# EAGLE board 13697_Wireless_Motor_Driver_Shield-panel.v14 (EAGLE 7.5.0), part 1 of 4
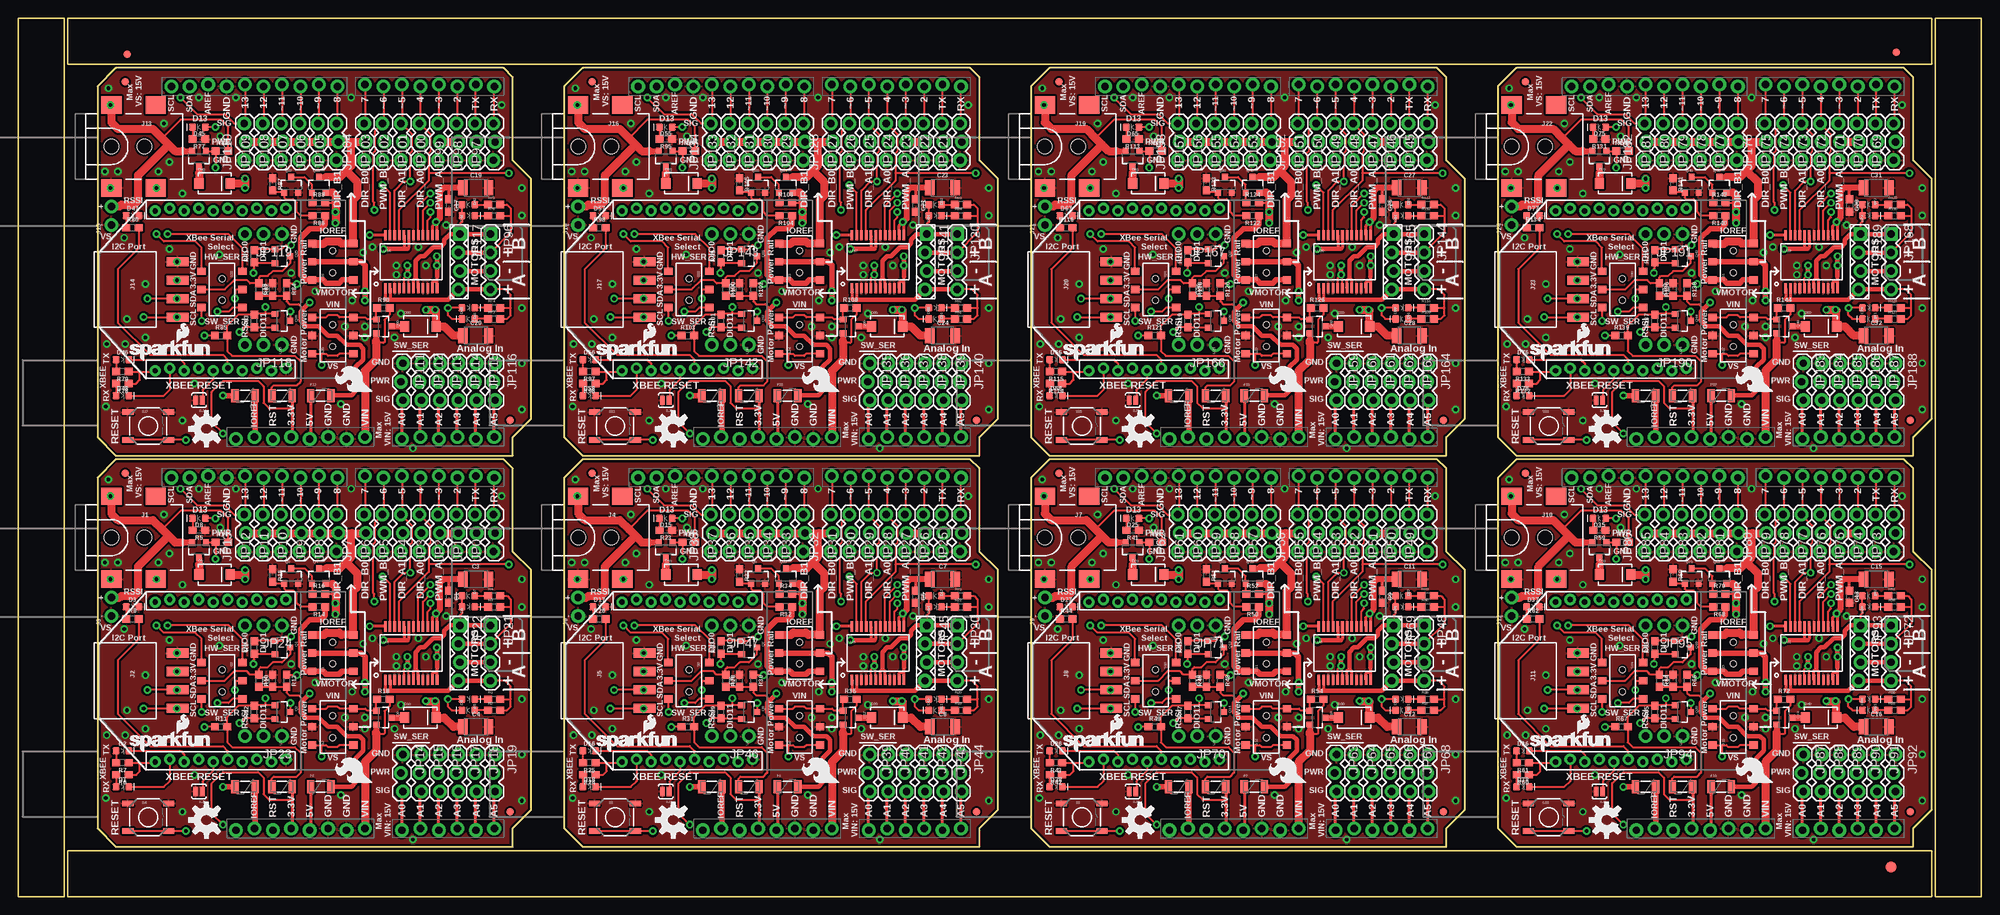
[diagram p0: board, top side]
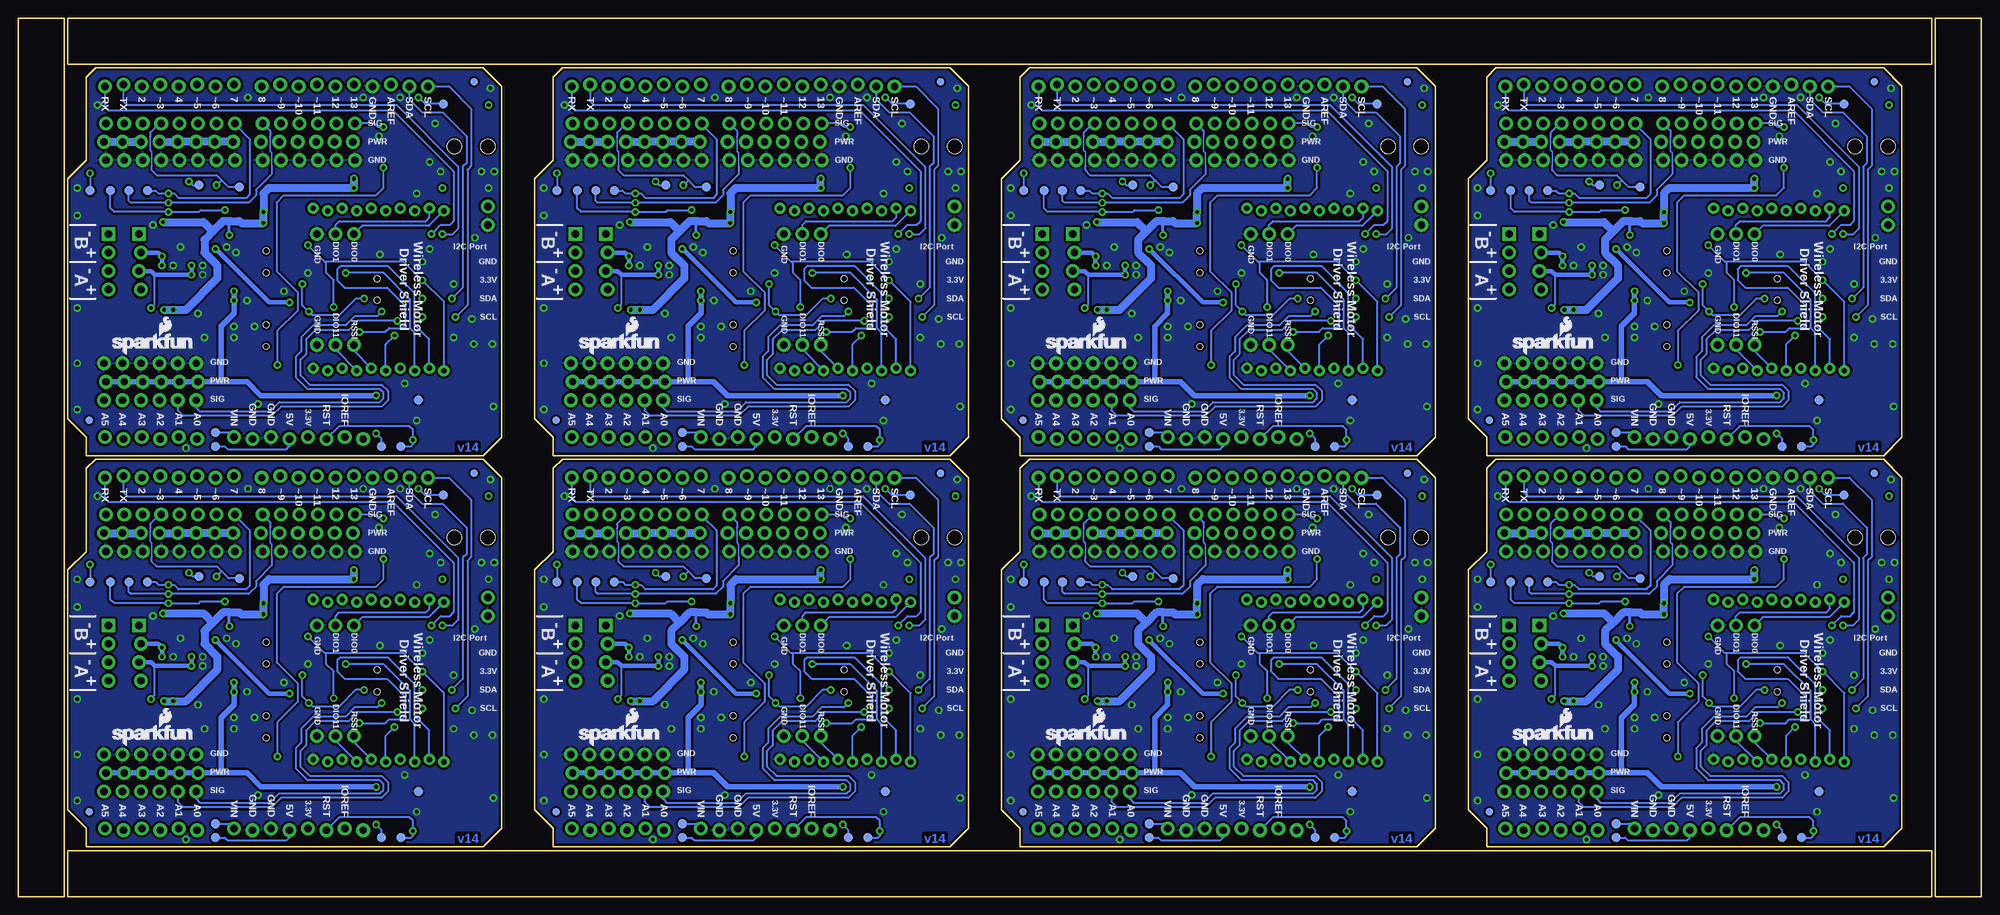
[diagram p1: board, bottom side, seen from below]

Size 270.26 x 120.9 mm. Coordinates in mm from the lower left corner, seen from the top.
Outline: 112 segments
Copper layers (1*16): Top 0.035mm / dielectric 1.5mm / Bottom 0.035mm
Design rules "SparkFun-2-layer-STANDARD": minimum track width 10mil, minimum drill 20mil, track to track 10mil, track to pad 8mil, pad to pad 8mil, via to via 10mil, smd to smd 8mil, copper to edge 8mil, drill to drill 8mil, minimum pad ring 10mil, minimum via ring 10mil, stop-mask expansion 4mil, vias tented up to drill 25mil, thermal gap 10mil
Net classes: 1 vcc: width 0.305 mm
tRestrict: area 52,29.7 to 52.3,30; area 55.9,29.7 to 56.2,30; area 116.3,29.7 to 116.5,30; area 120.2,29.7 to 120.4,30; area 180.6,29.7 to 180.8,30; area 184.5,29.7 to 184.7,30; area 244.8,29.7 to 245.1,30; area 248.7,29.7 to 248.9,30; area 52,83.6 to 52.3,83.8; area 55.9,83.6 to 56.2,83.8; area 116.3,83.6 to 116.5,83.8; area 120.2,83.6 to 120.4,83.8; 4 more areas

## Footprints (pad centres in the part's own frame; a part is rotated, then mirrored left to right if it is on the bottom)
0603 = smd 1.1 x 1: 1 -0.85,0; 2 0.85,0
1210 = smd 1.27 x 2.06: 1 -1.755,0; 2 1.755,0
LED-0603 = smd 1 x 1: A -0.877,0; C 0.877,0
SMA-DIODE = smd 1.27 x 1.47: A -2.15,0; C 2.15,0
FIDUCIAL-1.5X3 = smd 1.5 x 1.5: 1 0,0
FIDUCIAL-1X2 = smd 1 x 1: 1 0,0
PTC-1206 = smd 1 x 1.8: 1 -1.4,0; 2 1.4,0
POWER_JACK_SMD = smd 2.8 x 2.4: GND 0,-5.7; P$4 6.1,-5.7; VIN0 0,5.7; VIN1 6.1,5.7 | hole 2.032: 0,0; 4.572,0
1X04_SMD_RA_FEMALE = smd 1.25 x 3: 1 -3.81,7.225; 2 -1.27,7.225; 3 1.27,7.225; 4 3.81,7.225
1X02_NO_SILK = drill 1.016 pad 1.88: 1 0,0; 2 2.54,0
1X03_LOCK = drill 1.016 pad 1.88: 1 0,0.127; 2 2.54,-0.127; 3 5.08,0.127
1X04@1 = drill 1.016 pad 1.88 square: 1 0,0 | drill 1.016 pad 1.88: 2 2.54,0; 3 5.08,0; 4 7.62,0
1X04_LOCK@1 = drill 1.016 pad 1.88 square: 1 0,0.127 | drill 1.016 pad 1.88: 2 2.54,-0.127; 3 5.08,0.127; 4 7.62,-0.127
1X03_NO_SILK = drill 1.016 pad 1.88: 1 0,0; 2 2.54,0; 3 5.08,0
SOT23-3 = smd 0.8 x 0.9: 1 -0.95,-1; 2 0.95,-1; 3 0,1.1
AYZ0202 = smd 1 x 1.15: 1 -2.5,2.825; 2 0,2.825; 3 2.5,2.825; 4 -2.5,-2.825; 5 0,-2.825; 6 2.5,-2.825 | hole 0.85: 1.5,0; -1.5,0
TACTILE-SWITCH-SMD = smd 1.524 x 0.762: 1 -2.794,1.905; 2 2.794,1.905; 3 -2.794,-1.905; 4 2.794,-1.905
SJ_2S-NO = smd 0.635 x 1.27: 1 -0.45,0; 2 0.45,0
PAD.03X.05 = smd 1.27 x 1.27: P$1 0,0
XBEE-1_LOCK = drill 0.737 pad 1.524: 1 -11.178,20; 2 -10.822,18; 3 -11.178,16; 4 -10.822,14; 5 -11.178,12; 6 -10.822,10; 7 -11.178,8; 8 -10.822,6; 9 -11.178,4; 10 -10.822,2; 11 11.178,2; 12 10.822,4; 13 11.178,6; 14 10.822,8; 15 11.178,10; 16 10.822,12; 17 11.178,14; 18 10.822,16; 19 11.178,18; 20 10.822,20
UNO_R3_SHIELD_NOLABELS_LOCK = drill 1.016 pad 1.88: 3.3V 50.8,26.67; 5V 51.054,29.21; A0 51.054,41.91; A1 50.8,44.45; A2 51.054,46.99; A3 50.8,49.53; A4 51.054,52.07; A5 50.8,54.61; AREF 2.286,15.24; D2 2.54,49.53; D3 2.286,46.99; D4 2.54,44.45; D5 2.286,41.91; D6 2.54,39.37; D7 2.286,36.83; D8 2.54,33.02; D9 2.286,30.48; D10 2.54,27.94; D11 2.286,25.4; D12 2.54,22.86; D13 2.286,20.32; GND@0 50.8,31.75; GND@1 51.054,34.29; GND@2 2.54,17.78; IOREF 50.8,21.59; NC 51.054,19.05; RES 51.054,24.13; RX 2.54,54.61; SCL 2.54,10.16; SDA 2.54,12.7; TX 2.286,52.07; VIN 50.8,36.83
SSOP24 = smd 0.348 x 1.397: 1 -3.575,-3.656; 2 -2.925,-3.656; 3 -2.275,-3.656; 4 -1.625,-3.656; 5 -0.975,-3.656; 6 -0.325,-3.656; 7 0.325,-3.656; 8 0.975,-3.656; 9 1.625,-3.656; 10 2.275,-3.656; 11 2.925,-3.656; 12 3.575,-3.656; 13 3.575,3.656; 14 2.925,3.656; 15 2.275,3.656; 16 1.625,3.656; 17 0.975,3.656; 18 0.325,3.656; 19 -0.325,3.656; 20 -0.975,3.656; 21 -1.625,3.656; 22 -2.275,3.656; 23 -2.925,3.656; 24 -3.575,3.656

## Placement (x,y rotation side)
C1  0.1uF  [0603]  59.31,41.27 270 top
C2  0.1uF  [0603]  35.05,29.72 90 top
C3  10uF  [1210]  62.99,43.69 0 top
C4  10uF  [1210]  62.99,23.37 0 top
C5  0.1uF  [0603]  123.57,41.27 270 top
C6  0.1uF  [0603]  99.31,29.72 90 top
C7  10uF  [1210]  127.25,43.69 0 top
C8  10uF  [1210]  127.25,23.37 0 top
C9  0.1uF  [0603]  187.83,41.27 270 top
C10  0.1uF  [0603]  163.58,29.72 90 top
C11  10uF  [1210]  191.52,43.69 0 top
C12  10uF  [1210]  191.52,23.37 0 top
C13  0.1uF  [0603]  252.09,41.27 270 top
C14  0.1uF  [0603]  227.84,29.72 90 top
C15  10uF  [1210]  255.78,43.69 0 top
C16  10uF  [1210]  255.78,23.37 0 top
C17  0.1uF  [0603]  59.31,95.12 270 top
C18  0.1uF  [0603]  35.05,83.57 90 top
C19  10uF  [1210]  62.99,97.54 0 top
C20  10uF  [1210]  62.99,77.22 0 top
C21  0.1uF  [0603]  123.57,95.12 270 top
C22  0.1uF  [0603]  99.31,83.57 90 top
C23  10uF  [1210]  127.25,97.54 0 top
C24  10uF  [1210]  127.25,77.22 0 top
C25  0.1uF  [0603]  187.83,95.12 270 top
C26  0.1uF  [0603]  163.58,83.57 90 top
C27  10uF  [1210]  191.52,97.54 0 top
C28  10uF  [1210]  191.52,77.22 0 top
C29  0.1uF  [0603]  252.09,95.12 270 top
C30  0.1uF  [0603]  227.84,83.57 90 top
C31  10uF  [1210]  255.78,97.54 0 top
C32  10uF  [1210]  255.78,77.22 0 top
D1  Yellow  [LED-0603]  14.35,15.11 0 top
D2  GREEN  [LED-0603]  14.35,20.07 0 top
D3  RED  [LED-0603]  15.75,39.88 0 top
D4  BLUE  [LED-0603]  61.98,27.18 0 top
D5  Yellow  [LED-0603]  61.98,25.65 180 top
D6  BLUE  [LED-0603]  61.98,39.88 0 top
D7  Yellow  [LED-0603]  61.98,41.4 180 top
D8  GREEN  [LED-0603]  24.89,52.07 180 top
D9  B340A  [SMA-DIODE]  27.05,44.32 0 top
D10  B340A  [SMA-DIODE]  55.37,24.64 0 top
D11  Yellow  [LED-0603]  126.24,25.65 180 top
D12  Yellow  [LED-0603]  126.24,41.4 180 top
D13  BLUE  [LED-0603]  126.24,27.18 0 top
D14  BLUE  [LED-0603]  126.24,39.88 0 top
D15  GREEN  [LED-0603]  89.15,52.07 180 top
D16  GREEN  [LED-0603]  78.61,20.07 0 top
D17  RED  [LED-0603]  80.01,39.88 0 top
D18  Yellow  [LED-0603]  78.61,15.11 0 top
D19  B340A  [SMA-DIODE]  91.31,44.32 0 top
D20  B340A  [SMA-DIODE]  119.63,24.64 0 top
D21  Yellow  [LED-0603]  190.5,25.65 180 top
D22  Yellow  [LED-0603]  190.5,41.4 180 top
D23  BLUE  [LED-0603]  190.5,27.18 0 top
D24  BLUE  [LED-0603]  190.5,39.88 0 top
D25  GREEN  [LED-0603]  153.42,52.07 180 top
D26  GREEN  [LED-0603]  142.88,20.07 0 top
D27  RED  [LED-0603]  144.27,39.88 0 top
D28  Yellow  [LED-0603]  142.88,15.11 0 top
D29  B340A  [SMA-DIODE]  155.57,44.32 0 top
D30  B340A  [SMA-DIODE]  183.9,24.64 0 top
D31  Yellow  [LED-0603]  254.76,25.65 180 top
D32  Yellow  [LED-0603]  254.76,41.4 180 top
D33  BLUE  [LED-0603]  254.76,27.18 0 top
D34  BLUE  [LED-0603]  254.76,39.88 0 top
D35  GREEN  [LED-0603]  217.68,52.07 180 top
D36  GREEN  [LED-0603]  207.14,20.07 0 top
D37  RED  [LED-0603]  208.53,39.88 0 top
D38  Yellow  [LED-0603]  207.14,15.11 0 top
D39  B340A  [SMA-DIODE]  219.84,44.32 0 top
D40  B340A  [SMA-DIODE]  248.16,24.64 0 top
D41  Yellow  [LED-0603]  61.98,79.5 180 top
D42  Yellow  [LED-0603]  61.98,95.25 180 top
D43  BLUE  [LED-0603]  61.98,81.03 0 top
D44  BLUE  [LED-0603]  61.98,93.73 0 top
D45  GREEN  [LED-0603]  24.89,105.92 180 top
D46  GREEN  [LED-0603]  14.35,73.91 0 top
D47  RED  [LED-0603]  15.75,93.73 0 top
D48  Yellow  [LED-0603]  14.35,68.96 0 top
D49  B340A  [SMA-DIODE]  27.05,98.17 0 top
D50  B340A  [SMA-DIODE]  55.37,78.49 0 top
D51  Yellow  [LED-0603]  126.24,79.5 180 top
D52  Yellow  [LED-0603]  126.24,95.25 180 top
D53  BLUE  [LED-0603]  126.24,81.03 0 top
D54  BLUE  [LED-0603]  126.24,93.73 0 top
D55  GREEN  [LED-0603]  89.15,105.92 180 top
D56  GREEN  [LED-0603]  78.61,73.91 0 top
D57  RED  [LED-0603]  80.01,93.73 0 top
D58  Yellow  [LED-0603]  78.61,68.96 0 top
D59  B340A  [SMA-DIODE]  91.31,98.17 0 top
D60  B340A  [SMA-DIODE]  119.63,78.49 0 top
D61  Yellow  [LED-0603]  190.5,79.5 180 top
D62  Yellow  [LED-0603]  190.5,95.25 180 top
D63  BLUE  [LED-0603]  190.5,81.03 0 top
D64  BLUE  [LED-0603]  190.5,93.73 0 top
D65  GREEN  [LED-0603]  153.42,105.92 180 top
D66  GREEN  [LED-0603]  142.88,73.91 0 top
D67  RED  [LED-0603]  144.27,93.73 0 top
D68  Yellow  [LED-0603]  142.88,68.96 0 top
D69  B340A  [SMA-DIODE]  155.57,98.17 0 top
D70  B340A  [SMA-DIODE]  183.9,78.49 0 top
D71  Yellow  [LED-0603]  254.76,79.5 180 top
D72  Yellow  [LED-0603]  254.76,95.25 180 top
D73  BLUE  [LED-0603]  254.76,81.03 0 top
D74  BLUE  [LED-0603]  254.76,93.73 0 top
D75  GREEN  [LED-0603]  217.68,105.92 180 top
D76  GREEN  [LED-0603]  207.14,73.91 0 top
D77  RED  [LED-0603]  208.53,93.73 0 top
D78  Yellow  [LED-0603]  207.14,68.96 0 top
D79  B340A  [SMA-DIODE]  219.84,98.17 0 top
D80  B340A  [SMA-DIODE]  248.16,78.49 0 top
E$1  [FIDUCIAL-1.5X3]  257.81,4.06 0 top
E$5  [FIDUCIAL-1X2]  258.57,116.2 90 top
E$6  [FIDUCIAL-1X2]  14.99,115.95 270 top
F1  [PTC-1206]  105.92,15.11 0 top
F2  [PTC-1206]  41.66,15.11 0 top
F3  [PTC-1206]  36.32,15.11 180 top
F4  [PTC-1206]  31.24,15.11 180 top
F5  [PTC-1206]  100.58,15.11 180 top
F6  [PTC-1206]  95.5,15.11 180 top
F7  [PTC-1206]  170.18,15.11 0 top
F8  [PTC-1206]  164.85,15.11 180 top
F9  [PTC-1206]  159.77,15.11 180 top
F10  [PTC-1206]  234.44,15.11 0 top
F11  [PTC-1206]  229.11,15.11 180 top
F12  [PTC-1206]  224.03,15.11 180 top
F13  [PTC-1206]  41.66,68.96 0 top
F14  [PTC-1206]  36.32,68.96 180 top
F15  [PTC-1206]  31.24,68.96 180 top
F16  [PTC-1206]  105.92,68.96 0 top
F17  [PTC-1206]  100.58,68.96 180 top
F18  [PTC-1206]  95.5,68.96 180 top
F19  [PTC-1206]  170.18,68.96 0 top
F20  [PTC-1206]  164.85,68.96 180 top
F21  [PTC-1206]  159.77,68.96 180 top
F22  [PTC-1206]  234.44,68.96 0 top
F23  [PTC-1206]  229.11,68.96 180 top
F24  [PTC-1206]  224.03,68.96 180 top
FID1  FIDUCIAL1X2  [FIDUCIAL-1X2]  14.73,58.29 0 top
FID2  FIDUCIAL1X2  [FIDUCIAL-1X2]  67.69,11.68 0 top
FID3  FIDUCIAL1X2  [FIDUCIAL-1X2]  14.73,58.29 0 bottom
FID4  FIDUCIAL1X2  [FIDUCIAL-1X2]  67.69,11.68 0 bottom
FID5  FIDUCIAL1X2  [FIDUCIAL-1X2]  78.99,58.29 0 top
FID6  FIDUCIAL1X2  [FIDUCIAL-1X2]  131.95,11.68 0 top
FID7  FIDUCIAL1X2  [FIDUCIAL-1X2]  78.99,58.29 0 bottom
FID8  FIDUCIAL1X2  [FIDUCIAL-1X2]  131.95,11.68 0 bottom
FID9  FIDUCIAL1X2  [FIDUCIAL-1X2]  143.26,58.29 0 top
FID10  FIDUCIAL1X2  [FIDUCIAL-1X2]  196.22,11.68 0 top
FID11  FIDUCIAL1X2  [FIDUCIAL-1X2]  143.26,58.29 0 bottom
FID12  FIDUCIAL1X2  [FIDUCIAL-1X2]  196.22,11.68 0 bottom
FID13  FIDUCIAL1X2  [FIDUCIAL-1X2]  207.52,58.29 0 top
FID14  FIDUCIAL1X2  [FIDUCIAL-1X2]  260.48,11.68 0 top
FID15  FIDUCIAL1X2  [FIDUCIAL-1X2]  207.52,58.29 0 bottom
FID16  FIDUCIAL1X2  [FIDUCIAL-1X2]  260.48,11.68 0 bottom
FID17  FIDUCIAL1X2  [FIDUCIAL-1X2]  14.73,112.14 0 top
FID18  FIDUCIAL1X2  [FIDUCIAL-1X2]  67.69,65.53 0 top
FID19  FIDUCIAL1X2  [FIDUCIAL-1X2]  14.73,112.14 0 bottom
FID20  FIDUCIAL1X2  [FIDUCIAL-1X2]  67.69,65.53 0 bottom
FID21  FIDUCIAL1X2  [FIDUCIAL-1X2]  78.99,112.14 0 top
FID22  FIDUCIAL1X2  [FIDUCIAL-1X2]  131.95,65.53 0 top
FID23  FIDUCIAL1X2  [FIDUCIAL-1X2]  78.99,112.14 0 bottom
FID24  FIDUCIAL1X2  [FIDUCIAL-1X2]  131.95,65.53 0 bottom
FID25  FIDUCIAL1X2  [FIDUCIAL-1X2]  143.26,112.14 0 top
FID26  FIDUCIAL1X2  [FIDUCIAL-1X2]  196.22,65.53 0 top
FID27  FIDUCIAL1X2  [FIDUCIAL-1X2]  143.26,112.14 0 bottom
FID28  FIDUCIAL1X2  [FIDUCIAL-1X2]  196.22,65.53 0 bottom
FID29  FIDUCIAL1X2  [FIDUCIAL-1X2]  207.52,112.14 0 top
FID30  FIDUCIAL1X2  [FIDUCIAL-1X2]  260.48,65.53 0 top
FID31  FIDUCIAL1X2  [FIDUCIAL-1X2]  207.52,112.14 0 bottom
FID32  FIDUCIAL1X2  [FIDUCIAL-1X2]  260.48,65.53 0 bottom
J1  5.5x2.1mm Barrel  [POWER_JACK_SMD]  12.83,49.4 0 top
J2  [1X04_SMD_RA_FEMALE]  14.73,29.72 270 top
J3  [1X02_NO_SILK]  12.83,38.61 90 top
J4  5.5x2.1mm Barrel  [POWER_JACK_SMD]  77.09,49.4 0 top
J5  [1X04_SMD_RA_FEMALE]  78.99,29.72 270 top
J6  [1X02_NO_SILK]  77.09,38.61 90 top
J7  5.5x2.1mm Barrel  [POWER_JACK_SMD]  141.35,49.4 0 top
J8  [1X04_SMD_RA_FEMALE]  143.26,29.72 270 top
J9  [1X02_NO_SILK]  141.35,38.61 90 top
J10  5.5x2.1mm Barrel  [POWER_JACK_SMD]  205.61,49.4 0 top
J11  [1X04_SMD_RA_FEMALE]  207.52,29.72 270 top
J12  [1X02_NO_SILK]  205.61,38.61 90 top
J13  5.5x2.1mm Barrel  [POWER_JACK_SMD]  12.83,103.25 0 top
J14  [1X04_SMD_RA_FEMALE]  14.73,83.57 270 top
J15  [1X02_NO_SILK]  12.83,92.46 90 top
J16  5.5x2.1mm Barrel  [POWER_JACK_SMD]  77.09,103.25 0 top
J17  [1X04_SMD_RA_FEMALE]  78.99,83.57 270 top
J18  [1X02_NO_SILK]  77.09,92.46 90 top
J19  5.5x2.1mm Barrel  [POWER_JACK_SMD]  141.35,103.25 0 top
J20  [1X04_SMD_RA_FEMALE]  143.26,83.57 270 top
J21  [1X02_NO_SILK]  141.35,92.46 90 top
J22  5.5x2.1mm Barrel  [POWER_JACK_SMD]  205.61,103.25 0 top
J23  [1X04_SMD_RA_FEMALE]  207.52,83.57 270 top
J24  [1X02_NO_SILK]  205.61,92.46 90 top
JP0  D0  [1X03_LOCK]  65.53,47.5 90 top
JP1  D1  [1X03_LOCK]  62.99,47.5 90 top
JP2  D2  [1X03_LOCK]  60.45,47.5 90 top
JP3  D3  [1X03_LOCK]  57.91,47.5 90 top
JP4  D4  [1X03_LOCK]  55.37,47.5 90 top
JP5  D5  [1X03_LOCK]  52.83,47.5 90 top
JP6  D6  [1X03_LOCK]  50.29,47.5 90 top
JP7  D7  [1X03_LOCK]  47.75,47.5 90 top
JP8  D8  [1X03_LOCK]  43.94,47.5 90 top
JP9  D9  [1X03_LOCK]  41.4,47.5 90 top
JP10  D10  [1X03_LOCK]  38.86,47.5 90 top
JP11  D11  [1X03_LOCK]  36.32,47.5 90 top
JP12  D12  [1X03_LOCK]  33.78,47.5 90 top
JP13  D13  [1X03_LOCK]  31.24,47.5 90 top
JP14  A0  [1X03_LOCK]  52.83,19.56 270 top
JP15  A1  [1X03_LOCK]  55.37,19.56 270 top
JP16  A2  [1X03_LOCK]  57.91,19.56 270 top
JP17  A3  [1X03_LOCK]  60.45,19.56 270 top
JP18  A4  [1X03_LOCK]  62.99,19.56 270 top
JP19  A5  [1X03_LOCK]  65.53,19.56 270 top
JP20  [1X04@1]  129.29,37.34 270 top
JP21  [1X04@1]  65.02,37.34 270 top
JP22  [1X04_LOCK@1]  60.71,37.34 270 top
JP23  [1X03_NO_SILK]  36.32,22.1 180 top
JP24  [1X03_NO_SILK]  36.32,37.34 180 top
JP25  D0  [1X03_LOCK]  129.79,47.5 90 top
JP26  D1  [1X03_LOCK]  127.25,47.5 90 top
JP27  D2  [1X03_LOCK]  124.71,47.5 90 top
JP28  D3  [1X03_LOCK]  122.17,47.5 90 top
JP29  D4  [1X03_LOCK]  119.63,47.5 90 top
JP30  D5  [1X03_LOCK]  117.09,47.5 90 top
JP31  D6  [1X03_LOCK]  114.55,47.5 90 top
JP32  D7  [1X03_LOCK]  112.01,47.5 90 top
JP33  D8  [1X03_LOCK]  108.2,47.5 90 top
JP34  D9  [1X03_LOCK]  105.66,47.5 90 top
JP35  D10  [1X03_LOCK]  103.12,47.5 90 top
JP36  D11  [1X03_LOCK]  100.58,47.5 90 top
JP37  D12  [1X03_LOCK]  98.04,47.5 90 top
JP38  D13  [1X03_LOCK]  95.5,47.5 90 top
JP39  A0  [1X03_LOCK]  117.09,19.56 270 top
JP40  A1  [1X03_LOCK]  119.63,19.56 270 top
JP41  A2  [1X03_LOCK]  122.17,19.56 270 top
JP42  A3  [1X03_LOCK]  124.71,19.56 270 top
JP43  A4  [1X03_LOCK]  127.25,19.56 270 top
JP44  A5  [1X03_LOCK]  129.79,19.56 270 top
JP45  [1X04_LOCK@1]  124.97,37.34 270 top
JP46  [1X03_NO_SILK]  100.58,22.1 180 top
JP47  [1X03_NO_SILK]  100.58,37.34 180 top
JP48  [1X04@1]  193.55,37.34 270 top
JP49  D0  [1X03_LOCK]  194.06,47.5 90 top
JP50  D1  [1X03_LOCK]  191.52,47.5 90 top
JP51  D2  [1X03_LOCK]  188.98,47.5 90 top
JP52  D3  [1X03_LOCK]  186.44,47.5 90 top
JP53  D4  [1X03_LOCK]  183.9,47.5 90 top
JP54  D5  [1X03_LOCK]  181.36,47.5 90 top
JP55  D6  [1X03_LOCK]  178.82,47.5 90 top
JP56  D7  [1X03_LOCK]  176.28,47.5 90 top
JP57  D8  [1X03_LOCK]  172.47,47.5 90 top
JP58  D9  [1X03_LOCK]  169.93,47.5 90 top
JP59  D10  [1X03_LOCK]  167.39,47.5 90 top
JP60  D11  [1X03_LOCK]  164.85,47.5 90 top
JP61  D12  [1X03_LOCK]  162.31,47.5 90 top
JP62  D13  [1X03_LOCK]  159.77,47.5 90 top
JP63  A0  [1X03_LOCK]  181.36,19.56 270 top
JP64  A1  [1X03_LOCK]  183.9,19.56 270 top
JP65  A2  [1X03_LOCK]  186.44,19.56 270 top
JP66  A3  [1X03_LOCK]  188.98,19.56 270 top
JP67  A4  [1X03_LOCK]  191.52,19.56 270 top
JP68  A5  [1X03_LOCK]  194.06,19.56 270 top
JP69  [1X04_LOCK@1]  189.23,37.34 270 top
JP70  [1X03_NO_SILK]  164.85,22.1 180 top
JP71  [1X03_NO_SILK]  164.85,37.34 180 top
JP72  [1X04@1]  257.81,37.34 270 top
JP73  D0  [1X03_LOCK]  258.32,47.5 90 top
JP74  D1  [1X03_LOCK]  255.78,47.5 90 top
JP75  D2  [1X03_LOCK]  253.24,47.5 90 top
JP76  D3  [1X03_LOCK]  250.7,47.5 90 top
JP77  D4  [1X03_LOCK]  248.16,47.5 90 top
JP78  D5  [1X03_LOCK]  245.62,47.5 90 top
JP79  D6  [1X03_LOCK]  243.08,47.5 90 top
JP80  D7  [1X03_LOCK]  240.54,47.5 90 top
JP81  D8  [1X03_LOCK]  236.73,47.5 90 top
JP82  D9  [1X03_LOCK]  234.19,47.5 90 top
JP83  D10  [1X03_LOCK]  231.65,47.5 90 top
JP84  D11  [1X03_LOCK]  229.11,47.5 90 top
JP85  D12  [1X03_LOCK]  226.57,47.5 90 top
JP86  D13  [1X03_LOCK]  224.03,47.5 90 top
JP87  A0  [1X03_LOCK]  245.62,19.56 270 top
JP88  A1  [1X03_LOCK]  248.16,19.56 270 top
JP89  A2  [1X03_LOCK]  250.7,19.56 270 top
JP90  A3  [1X03_LOCK]  253.24,19.56 270 top
JP91  A4  [1X03_LOCK]  255.78,19.56 270 top
JP92  A5  [1X03_LOCK]  258.32,19.56 270 top
JP93  [1X04_LOCK@1]  253.49,37.34 270 top
JP94  [1X03_NO_SILK]  229.11,22.1 180 top
JP95  [1X03_NO_SILK]  229.11,37.34 180 top
JP96  [1X04@1]  65.02,91.19 270 top
JP97  D0  [1X03_LOCK]  65.53,101.35 90 top
JP98  D1  [1X03_LOCK]  62.99,101.35 90 top
JP99  D2  [1X03_LOCK]  60.45,101.35 90 top
JP100  D3  [1X03_LOCK]  57.91,101.35 90 top
JP101  D4  [1X03_LOCK]  55.37,101.35 90 top
JP102  D5  [1X03_LOCK]  52.83,101.35 90 top
JP103  D6  [1X03_LOCK]  50.29,101.35 90 top
JP104  D7  [1X03_LOCK]  47.75,101.35 90 top
JP105  D8  [1X03_LOCK]  43.94,101.35 90 top
JP106  D9  [1X03_LOCK]  41.4,101.35 90 top
JP107  D10  [1X03_LOCK]  38.86,101.35 90 top
JP108  D11  [1X03_LOCK]  36.32,101.35 90 top
JP109  D12  [1X03_LOCK]  33.78,101.35 90 top
JP110  D13  [1X03_LOCK]  31.24,101.35 90 top
JP111  A0  [1X03_LOCK]  52.83,73.41 270 top
JP112  A1  [1X03_LOCK]  55.37,73.41 270 top
JP113  A2  [1X03_LOCK]  57.91,73.41 270 top
JP114  A3  [1X03_LOCK]  60.45,73.41 270 top
JP115  A4  [1X03_LOCK]  62.99,73.41 270 top
JP116  A5  [1X03_LOCK]  65.53,73.41 270 top
JP117  [1X04_LOCK@1]  60.71,91.19 270 top
JP118  [1X03_NO_SILK]  36.32,75.95 180 top
JP119  [1X03_NO_SILK]  36.32,91.19 180 top
JP120  [1X04@1]  129.29,91.19 270 top
JP121  D0  [1X03_LOCK]  129.79,101.35 90 top
JP122  D1  [1X03_LOCK]  127.25,101.35 90 top
JP123  D2  [1X03_LOCK]  124.71,101.35 90 top
JP124  D3  [1X03_LOCK]  122.17,101.35 90 top
JP125  D4  [1X03_LOCK]  119.63,101.35 90 top
JP126  D5  [1X03_LOCK]  117.09,101.35 90 top
JP127  D6  [1X03_LOCK]  114.55,101.35 90 top
JP128  D7  [1X03_LOCK]  112.01,101.35 90 top
JP129  D8  [1X03_LOCK]  108.2,101.35 90 top
JP130  D9  [1X03_LOCK]  105.66,101.35 90 top
JP131  D10  [1X03_LOCK]  103.12,101.35 90 top
JP132  D11  [1X03_LOCK]  100.58,101.35 90 top
JP133  D12  [1X03_LOCK]  98.04,101.35 90 top
JP134  D13  [1X03_LOCK]  95.5,101.35 90 top
JP135  A0  [1X03_LOCK]  117.09,73.41 270 top
JP136  A1  [1X03_LOCK]  119.63,73.41 270 top
JP137  A2  [1X03_LOCK]  122.17,73.41 270 top
JP138  A3  [1X03_LOCK]  124.71,73.41 270 top
JP139  A4  [1X03_LOCK]  127.25,73.41 270 top
JP140  A5  [1X03_LOCK]  129.79,73.41 270 top
JP141  [1X04_LOCK@1]  124.97,91.19 270 top
JP142  [1X03_NO_SILK]  100.58,75.95 180 top
JP143  [1X03_NO_SILK]  100.58,91.19 180 top
JP144  [1X04@1]  193.55,91.19 270 top
JP145  D0  [1X03_LOCK]  194.06,101.35 90 top
JP146  D1  [1X03_LOCK]  191.52,101.35 90 top
JP147  D2  [1X03_LOCK]  188.98,101.35 90 top
JP148  D3  [1X03_LOCK]  186.44,101.35 90 top
JP149  D4  [1X03_LOCK]  183.9,101.35 90 top
JP150  D5  [1X03_LOCK]  181.36,101.35 90 top
JP151  D6  [1X03_LOCK]  178.82,101.35 90 top
JP152  D7  [1X03_LOCK]  176.28,101.35 90 top
JP153  D8  [1X03_LOCK]  172.47,101.35 90 top
JP154  D9  [1X03_LOCK]  169.93,101.35 90 top
JP155  D10  [1X03_LOCK]  167.39,101.35 90 top
JP156  D11  [1X03_LOCK]  164.85,101.35 90 top
JP157  D12  [1X03_LOCK]  162.31,101.35 90 top
JP158  D13  [1X03_LOCK]  159.77,101.35 90 top
JP159  A0  [1X03_LOCK]  181.36,73.41 270 top
JP160  A1  [1X03_LOCK]  183.9,73.41 270 top
JP161  A2  [1X03_LOCK]  186.44,73.41 270 top
JP162  A3  [1X03_LOCK]  188.98,73.41 270 top
JP163  A4  [1X03_LOCK]  191.52,73.41 270 top
JP164  A5  [1X03_LOCK]  194.06,73.41 270 top
JP165  [1X04_LOCK@1]  189.23,91.19 270 top
JP166  [1X03_NO_SILK]  164.85,75.95 180 top
JP167  [1X03_NO_SILK]  164.85,91.19 180 top
JP168  [1X04@1]  257.81,91.19 270 top
JP169  D0  [1X03_LOCK]  258.32,101.35 90 top
JP170  D1  [1X03_LOCK]  255.78,101.35 90 top
JP171  D2  [1X03_LOCK]  253.24,101.35 90 top
JP172  D3  [1X03_LOCK]  250.7,101.35 90 top
JP173  D4  [1X03_LOCK]  248.16,101.35 90 top
JP174  D5  [1X03_LOCK]  245.62,101.35 90 top
JP175  D6  [1X03_LOCK]  243.08,101.35 90 top
JP176  D7  [1X03_LOCK]  240.54,101.35 90 top
JP177  D8  [1X03_LOCK]  236.73,101.35 90 top
JP178  D9  [1X03_LOCK]  234.19,101.35 90 top
JP179  D10  [1X03_LOCK]  231.65,101.35 90 top
JP180  D11  [1X03_LOCK]  229.11,101.35 90 top
JP181  D12  [1X03_LOCK]  226.57,101.35 90 top
JP182  D13  [1X03_LOCK]  224.03,101.35 90 top
JP183  A0  [1X03_LOCK]  245.62,73.41 270 top
JP184  A1  [1X03_LOCK]  248.16,73.41 270 top
JP185  A2  [1X03_LOCK]  250.7,73.41 270 top
JP186  A3  [1X03_LOCK]  253.24,73.41 270 top
JP187  A4  [1X03_LOCK]  255.78,73.41 270 top
JP188  A5  [1X03_LOCK]  258.32,73.41 270 top
JP189  [1X04_LOCK@1]  253.49,91.19 270 top
JP190  [1X03_NO_SILK]  229.11,75.95 180 top
JP191  [1X03_NO_SILK]  229.11,91.19 180 top
LOGO1  OSHW-LOGOM  [OSHW-LOGO-M]  25.91,10.54 90 top
LOGO2  SFE_LOGO_NAME_FLAME.1_INCH  [SFE_LOGO_NAME_FLAME_.1]  14.99,19.81 0 top
LOGO3  SFE_LOGO_FLAME.2_INCH  [SFE_LOGO_FLAME_.2]  49.02,15.37 90 top
LOGO4  SFE_LOGO_NAME_FLAME.1_INCH  [SFE_LOGO_NAME_FLAME_.1]  64.9,20.7 0 bottom
LOGO5  OSHW-LOGOM  [OSHW-LOGO-M]  90.17,10.54 90 top
LOGO6  SFE_LOGO_NAME_FLAME.1_INCH  [SFE_LOGO_NAME_FLAME_.1]  79.25,19.81 0 top
LOGO7  SFE_LOGO_FLAME.2_INCH  [SFE_LOGO_FLAME_.2]  113.28,15.37 90 top
LOGO8  SFE_LOGO_NAME_FLAME.1_INCH  [SFE_LOGO_NAME_FLAME_.1]  129.16,20.7 0 bottom
LOGO9  OSHW-LOGOM  [OSHW-LOGO-M]  154.43,10.54 90 top
LOGO10  SFE_LOGO_NAME_FLAME.1_INCH  [SFE_LOGO_NAME_FLAME_.1]  143.51,19.81 0 top
LOGO11  SFE_LOGO_FLAME.2_INCH  [SFE_LOGO_FLAME_.2]  177.55,15.37 90 top
LOGO12  SFE_LOGO_NAME_FLAME.1_INCH  [SFE_LOGO_NAME_FLAME_.1]  193.42,20.7 0 bottom
LOGO13  OSHW-LOGOM  [OSHW-LOGO-M]  218.69,10.54 90 top
LOGO14  SFE_LOGO_NAME_FLAME.1_INCH  [SFE_LOGO_NAME_FLAME_.1]  207.77,19.81 0 top
LOGO15  SFE_LOGO_FLAME.2_INCH  [SFE_LOGO_FLAME_.2]  241.81,15.37 90 top
LOGO16  SFE_LOGO_NAME_FLAME.1_INCH  [SFE_LOGO_NAME_FLAME_.1]  257.68,20.7 0 bottom
LOGO17  OSHW-LOGOM  [OSHW-LOGO-M]  25.91,64.39 90 top
LOGO18  SFE_LOGO_NAME_FLAME.1_INCH  [SFE_LOGO_NAME_FLAME_.1]  14.99,73.66 0 top
LOGO19  SFE_LOGO_FLAME.2_INCH  [SFE_LOGO_FLAME_.2]  49.02,69.22 90 top
LOGO20  SFE_LOGO_NAME_FLAME.1_INCH  [SFE_LOGO_NAME_FLAME_.1]  64.9,74.55 0 bottom
LOGO21  OSHW-LOGOM  [OSHW-LOGO-M]  90.17,64.39 90 top
LOGO22  SFE_LOGO_NAME_FLAME.1_INCH  [SFE_LOGO_NAME_FLAME_.1]  79.25,73.66 0 top
LOGO23  SFE_LOGO_FLAME.2_INCH  [SFE_LOGO_FLAME_.2]  113.28,69.22 90 top
LOGO24  SFE_LOGO_NAME_FLAME.1_INCH  [SFE_LOGO_NAME_FLAME_.1]  129.16,74.55 0 bottom
LOGO25  OSHW-LOGOM  [OSHW-LOGO-M]  154.43,64.39 90 top
LOGO26  SFE_LOGO_NAME_FLAME.1_INCH  [SFE_LOGO_NAME_FLAME_.1]  143.51,73.66 0 top
LOGO27  SFE_LOGO_FLAME.2_INCH  [SFE_LOGO_FLAME_.2]  177.55,69.22 90 top
LOGO28  SFE_LOGO_NAME_FLAME.1_INCH  [SFE_LOGO_NAME_FLAME_.1]  193.42,74.55 0 bottom
LOGO29  OSHW-LOGOM  [OSHW-LOGO-M]  218.69,64.39 90 top
LOGO30  SFE_LOGO_NAME_FLAME.1_INCH  [SFE_LOGO_NAME_FLAME_.1]  207.77,73.66 0 top
LOGO31  SFE_LOGO_FLAME.2_INCH  [SFE_LOGO_FLAME_.2]  241.81,69.22 90 top
LOGO32  SFE_LOGO_NAME_FLAME.1_INCH  [SFE_LOGO_NAME_FLAME_.1]  257.68,74.55 0 bottom
Q1  MOSFET-NCHANNELBSS138  [SOT23-3]  36.32,34.29 270 top
Q2  MOSFET-NCHANNELBSS138  [SOT23-3]  36.32,25.4 270 top
Q3  MMBT2222A  [SOT23-3]  37.59,44.07 0 top
Q4  DMG2307L  [SOT23-3]  41.4,44.07 0 top
Q5  DMG2307L  [SOT23-3]  24.89,47.75 180 top
Q6  DMG2307L  [SOT23-3]  50.29,24.64 270 top
Q7  MOSFET-NCHANNELBSS138  [SOT23-3]  100.58,34.29 270 top
Q8  MOSFET-NCHANNELBSS138  [SOT23-3]  100.58,25.4 270 top
Q9  MMBT2222A  [SOT23-3]  101.85,44.07 0 top
Q10  DMG2307L  [SOT23-3]  105.66,44.07 0 top
Q11  DMG2307L  [SOT23-3]  89.15,47.75 180 top
Q12  DMG2307L  [SOT23-3]  114.55,24.64 270 top
Q13  MOSFET-NCHANNELBSS138  [SOT23-3]  164.85,34.29 270 top
Q14  MOSFET-NCHANNELBSS138  [SOT23-3]  164.85,25.4 270 top
Q15  MMBT2222A  [SOT23-3]  166.12,44.07 0 top
Q16  DMG2307L  [SOT23-3]  169.93,44.07 0 top
Q17  DMG2307L  [SOT23-3]  153.42,47.75 180 top
Q18  DMG2307L  [SOT23-3]  178.82,24.64 270 top
Q19  MOSFET-NCHANNELBSS138  [SOT23-3]  229.11,34.29 270 top
Q20  MOSFET-NCHANNELBSS138  [SOT23-3]  229.11,25.4 270 top
Q21  MMBT2222A  [SOT23-3]  230.38,44.07 0 top
Q22  DMG2307L  [SOT23-3]  234.19,44.07 0 top
Q23  DMG2307L  [SOT23-3]  217.68,47.75 180 top
Q24  DMG2307L  [SOT23-3]  243.08,24.64 270 top
Q25  MOSFET-NCHANNELBSS138  [SOT23-3]  36.32,88.14 270 top
Q26  MOSFET-NCHANNELBSS138  [SOT23-3]  36.32,79.25 270 top
Q27  MMBT2222A  [SOT23-3]  37.59,97.92 0 top
Q28  DMG2307L  [SOT23-3]  41.4,97.92 0 top
Q29  DMG2307L  [SOT23-3]  24.89,101.6 180 top
Q30  DMG2307L  [SOT23-3]  50.29,78.49 270 top
Q31  MOSFET-NCHANNELBSS138  [SOT23-3]  100.58,88.14 270 top
Q32  MOSFET-NCHANNELBSS138  [SOT23-3]  100.58,79.25 270 top
Q33  MMBT2222A  [SOT23-3]  101.85,97.92 0 top
Q34  DMG2307L  [SOT23-3]  105.66,97.92 0 top
Q35  DMG2307L  [SOT23-3]  89.15,101.6 180 top
Q36  DMG2307L  [SOT23-3]  114.55,78.49 270 top
Q37  MOSFET-NCHANNELBSS138  [SOT23-3]  164.85,88.14 270 top
Q38  MOSFET-NCHANNELBSS138  [SOT23-3]  164.85,79.25 270 top
Q39  MMBT2222A  [SOT23-3]  166.12,97.92 0 top
Q40  DMG2307L  [SOT23-3]  169.93,97.92 0 top
Q41  DMG2307L  [SOT23-3]  153.42,101.6 180 top
Q42  DMG2307L  [SOT23-3]  178.82,78.49 270 top
Q43  MOSFET-NCHANNELBSS138  [SOT23-3]  229.11,88.14 270 top
Q44  MOSFET-NCHANNELBSS138  [SOT23-3]  229.11,79.25 270 top
Q45  MMBT2222A  [SOT23-3]  230.38,97.92 0 top
Q46  DMG2307L  [SOT23-3]  234.19,97.92 0 top
Q47  DMG2307L  [SOT23-3]  217.68,101.6 180 top
Q48  DMG2307L  [SOT23-3]  243.08,78.49 270 top
R1  1k  [0603]  65.53,27.18 0 top
R2  1k  [0603]  65.53,25.65 0 top
R3  1k  [0603]  65.53,39.88 0 top
R4  1k  [0603]  65.53,41.4 0 top
R5  330  [0603]  24.89,50.42 180 top
R6  1k  [0603]  14.35,16.76 180 top
R7  1k  [0603]  14.35,18.41 180 top
R8  1k  [0603]  15.75,38.23 0 top
R9  1k  [0603]  32.51,34.29 90 top
R10  1k  [0603]  33.15,29.72 270 top
R11  1k  [0603]  27.94,23.37 0 top
R12  1k  [0603]  32.51,25.4 90 top
R13  1k  [0603]  36.96,29.72 270 top
R14  1k  [0603]  41.4,39.88 180 top
R15  10k  [0603]  35.05,44.2 270 top
R16  10k  [0603]  41.4,41.66 0 top
R17  10k  [0603]  28.07,48.77 0 top
R18  10k  [0603]  50.29,27.18 0 top
R19  1k  [0603]  129.79,25.65 0 top
R20  1k  [0603]  129.79,27.18 0 top
R21  1k  [0603]  129.79,41.4 0 top
R22  1k  [0603]  129.79,39.88 0 top
R23  330  [0603]  89.15,50.42 180 top
R24  1k  [0603]  78.61,16.76 180 top
R25  1k  [0603]  78.61,18.41 180 top
R26  1k  [0603]  80.01,38.23 0 top
R27  1k  [0603]  96.77,34.29 90 top
R28  1k  [0603]  97.41,29.72 270 top
R29  1k  [0603]  96.77,25.4 90 top
R30  1k  [0603]  101.22,29.72 270 top
R31  1k  [0603]  92.2,23.37 0 top
R32  1k  [0603]  105.66,39.88 180 top
R33  10k  [0603]  99.31,44.2 270 top
R34  10k  [0603]  105.66,41.66 0 top
R35  10k  [0603]  92.33,48.77 0 top
R36  10k  [0603]  114.55,27.18 0 top
R37  1k  [0603]  194.06,25.65 0 top
R38  1k  [0603]  194.06,27.18 0 top
R39  1k  [0603]  194.06,41.4 0 top
R40  1k  [0603]  194.06,39.88 0 top
R41  330  [0603]  153.42,50.42 180 top
R42  1k  [0603]  142.88,16.76 180 top
R43  1k  [0603]  142.88,18.41 180 top
R44  1k  [0603]  144.27,38.23 0 top
R45  1k  [0603]  161.04,34.29 90 top
R46  1k  [0603]  161.67,29.72 270 top
R47  1k  [0603]  161.04,25.4 90 top
R48  1k  [0603]  165.48,29.72 270 top
R49  1k  [0603]  156.46,23.37 0 top
R50  1k  [0603]  169.93,39.88 180 top
R51  10k  [0603]  163.58,44.2 270 top
R52  10k  [0603]  169.93,41.66 0 top
R53  10k  [0603]  156.59,48.77 0 top
R54  10k  [0603]  178.82,27.18 0 top
R55  1k  [0603]  258.32,25.65 0 top
R56  1k  [0603]  258.32,27.18 0 top
R57  1k  [0603]  258.32,41.4 0 top
R58  1k  [0603]  258.32,39.88 0 top
R59  330  [0603]  217.68,50.42 180 top
R60  1k  [0603]  207.14,16.76 180 top
R61  1k  [0603]  207.14,18.41 180 top
R62  1k  [0603]  208.53,38.23 0 top
R63  1k  [0603]  225.3,34.29 90 top
R64  1k  [0603]  225.93,29.72 270 top
R65  1k  [0603]  225.3,25.4 90 top
R66  1k  [0603]  229.74,29.72 270 top
R67  1k  [0603]  220.73,23.37 0 top
R68  1k  [0603]  234.19,39.88 180 top
R69  10k  [0603]  227.84,44.2 270 top
R70  10k  [0603]  234.19,41.66 0 top
R71  10k  [0603]  220.85,48.77 0 top
R72  10k  [0603]  243.08,27.18 0 top
R73  1k  [0603]  65.53,79.5 0 top
R74  1k  [0603]  65.53,81.03 0 top
R75  1k  [0603]  65.53,95.25 0 top
R76  1k  [0603]  65.53,93.73 0 top
R77  330  [0603]  24.89,104.27 180 top
R78  1k  [0603]  14.35,70.61 180 top
R79  1k  [0603]  14.35,72.26 180 top
R80  1k  [0603]  15.75,92.08 0 top
R81  1k  [0603]  32.51,88.14 90 top
R82  1k  [0603]  33.15,83.57 270 top
R83  1k  [0603]  32.51,79.25 90 top
R84  1k  [0603]  36.96,83.57 270 top
R85  1k  [0603]  27.94,77.22 0 top
R86  1k  [0603]  41.4,93.73 180 top
R87  10k  [0603]  35.05,98.04 270 top
R88  10k  [0603]  41.4,95.5 0 top
R89  10k  [0603]  28.07,102.62 0 top
R90  10k  [0603]  50.29,81.03 0 top
R91  1k  [0603]  129.79,79.5 0 top
R92  1k  [0603]  129.79,81.03 0 top
R93  1k  [0603]  129.79,95.25 0 top
R94  1k  [0603]  129.79,93.73 0 top
R95  330  [0603]  89.15,104.27 180 top
R96  1k  [0603]  78.61,70.61 180 top
R97  1k  [0603]  78.61,72.26 180 top
R98  1k  [0603]  80.01,92.08 0 top
R99  1k  [0603]  96.77,88.14 90 top
R100  1k  [0603]  97.41,83.57 270 top
R101  1k  [0603]  96.77,79.25 90 top
R102  1k  [0603]  101.22,83.57 270 top
R103  1k  [0603]  92.2,77.22 0 top
R104  1k  [0603]  105.66,93.73 180 top
R105  10k  [0603]  99.31,98.04 270 top
R106  10k  [0603]  105.66,95.5 0 top
R107  10k  [0603]  92.33,102.62 0 top
R108  10k  [0603]  114.55,81.03 0 top
R109  1k  [0603]  194.06,79.5 0 top
R110  1k  [0603]  194.06,81.03 0 top
R111  1k  [0603]  194.06,95.25 0 top
R112  1k  [0603]  194.06,93.73 0 top
R113  330  [0603]  153.42,104.27 180 top
R114  1k  [0603]  142.88,70.61 180 top
R115  1k  [0603]  142.88,72.26 180 top
R116  1k  [0603]  144.27,92.08 0 top
R117  1k  [0603]  161.04,88.14 90 top
R118  1k  [0603]  161.67,83.57 270 top
R119  1k  [0603]  161.04,79.25 90 top
R120  1k  [0603]  165.48,83.57 270 top
R121  1k  [0603]  156.46,77.22 0 top
R122  1k  [0603]  169.93,93.73 180 top
R123  10k  [0603]  163.58,98.04 270 top
R124  10k  [0603]  169.93,95.5 0 top
R125  10k  [0603]  156.59,102.62 0 top
R126  10k  [0603]  178.82,81.03 0 top
R127  1k  [0603]  258.32,79.5 0 top
R128  1k  [0603]  258.32,81.03 0 top
R129  1k  [0603]  258.32,95.25 0 top
R130  1k  [0603]  258.32,93.73 0 top
R131  330  [0603]  217.68,104.27 180 top
R132  1k  [0603]  207.14,70.61 180 top
R133  1k  [0603]  207.14,72.26 180 top
R134  1k  [0603]  208.53,92.08 0 top
R135  1k  [0603]  225.3,88.14 90 top
R136  1k  [0603]  225.93,83.57 270 top
R137  1k  [0603]  225.3,79.25 90 top
R138  1k  [0603]  229.74,83.57 270 top
R139  1k  [0603]  220.73,77.22 0 top
R140  1k  [0603]  234.19,93.73 180 top
R141  10k  [0603]  227.84,98.04 270 top
R142  10k  [0603]  234.19,95.5 0 top
R143  10k  [0603]  220.85,102.62 0 top
R144  10k  [0603]  243.08,81.03 0 top
S1  [AYZ0202]  43.31,33.53 90 top
S2  DPDT  [AYZ0202]  28.07,29.72 270 top
S3  [AYZ0202]  43.31,23.37 90 top
S4  RESET  [TACTILE-SWITCH-SMD]  17.91,10.92 0 top
S5  RESET  [TACTILE-SWITCH-SMD]  82.17,10.92 0 top
S6  DPDT  [AYZ0202]  92.33,29.72 270 top
S7  [AYZ0202]  107.57,33.53 90 top
S8  [AYZ0202]  107.57,23.37 90 top
S9  RESET  [TACTILE-SWITCH-SMD]  146.43,10.92 0 top
S10  DPDT  [AYZ0202]  156.59,29.72 270 top
S11  [AYZ0202]  171.83,33.53 90 top
S12  [AYZ0202]  171.83,23.37 90 top
S13  RESET  [TACTILE-SWITCH-SMD]  210.69,10.92 0 top
S14  DPDT  [AYZ0202]  220.85,29.72 270 top
S15  [AYZ0202]  236.09,33.53 90 top
S16  [AYZ0202]  236.09,23.37 90 top
S17  RESET  [TACTILE-SWITCH-SMD]  17.91,64.77 0 top
S18  DPDT  [AYZ0202]  28.07,83.57 270 top
S19  [AYZ0202]  43.31,87.38 90 top
S20  [AYZ0202]  43.31,77.22 90 top
S21  RESET  [TACTILE-SWITCH-SMD]  82.17,64.77 0 top
S22  DPDT  [AYZ0202]  92.33,83.57 270 top
S23  [AYZ0202]  107.57,87.38 90 top
S24  [AYZ0202]  107.57,77.22 90 top
S25  RESET  [TACTILE-SWITCH-SMD]  146.43,64.77 0 top
S26  DPDT  [AYZ0202]  156.59,83.57 270 top
S27  [AYZ0202]  171.83,87.38 90 top
S28  [AYZ0202]  171.83,77.22 90 top
S29  RESET  [TACTILE-SWITCH-SMD]  210.69,64.77 0 top
S30  DPDT  [AYZ0202]  220.85,83.57 270 top
S31  [AYZ0202]  236.09,87.38 90 top
S32  [AYZ0202]  236.09,77.22 90 top
SJ1  [SJ_2S-NO]  89.15,14.48 180 top
SJ2  [SJ_2S-NO]  153.42,14.48 180 top
SJ3  [SJ_2S-NO]  217.68,14.48 180 top
SJ4  [SJ_2S-NO]  24.89,68.33 180 top
SJ5  [SJ_2S-NO]  24.89,14.48 180 top
SJ6  [SJ_2S-NO]  89.15,68.33 180 top
SJ7  [SJ_2S-NO]  153.42,68.33 180 top
SJ8  [SJ_2S-NO]  217.68,68.33 180 top
TP1  [PAD.03X.05]  67.56,43.31 90 bottom
TP2  [PAD.03X.05]  52.58,44.07 90 bottom
TP3  [PAD.03X.05]  46.99,43.81 90 bottom
TP4  [PAD.03X.05]  59.69,43.31 90 bottom
TP5  [PAD.03X.05]  62.23,43.31 90 bottom
TP6  [PAD.03X.05]  64.77,43.31 180 bottom
TP7  [PAD.03X.05]  18.92,55.24 180 bottom
TP8  [PAD.03X.05]  50.29,8.13 90 bottom
TP9  [PAD.03X.05]  22.35,14.48 0 bottom
TP10  [PAD.03X.05]  50.29,10.03 0 bottom
TP11  [PAD.03X.05]  27.43,8.13 0 bottom
TP12  [PAD.03X.05]  24.77,8.13 0 bottom
TP13  [PAD.03X.05]  131.83,43.31 90 bottom
TP14  [PAD.03X.05]  116.84,44.07 90 bottom
TP15  [PAD.03X.05]  111.25,43.81 90 bottom
TP16  [PAD.03X.05]  123.95,43.31 90 bottom
TP17  [PAD.03X.05]  126.49,43.31 90 bottom
TP18  [PAD.03X.05]  129.03,43.31 180 bottom
TP19  [PAD.03X.05]  83.19,55.24 180 bottom
TP20  [PAD.03X.05]  114.55,8.13 90 bottom
TP21  [PAD.03X.05]  86.61,14.48 0 bottom
TP22  [PAD.03X.05]  114.55,10.03 0 bottom
TP23  [PAD.03X.05]  91.69,8.13 0 bottom
TP24  [PAD.03X.05]  89.03,8.13 0 bottom
TP25  [PAD.03X.05]  196.09,43.31 90 bottom
TP26  [PAD.03X.05]  181.1,44.07 90 bottom
TP27  [PAD.03X.05]  175.51,43.81 90 bottom
TP28  [PAD.03X.05]  188.21,43.31 90 bottom
TP29  [PAD.03X.05]  190.75,43.31 90 bottom
TP30  [PAD.03X.05]  193.29,43.31 180 bottom
TP31  [PAD.03X.05]  147.45,55.24 180 bottom
TP32  [PAD.03X.05]  178.82,8.13 90 bottom
TP33  [PAD.03X.05]  150.88,14.48 0 bottom
TP34  [PAD.03X.05]  178.82,10.03 0 bottom
TP35  [PAD.03X.05]  155.96,8.13 0 bottom
TP36  [PAD.03X.05]  153.29,8.13 0 bottom
TP37  [PAD.03X.05]  260.35,43.31 90 bottom
TP38  [PAD.03X.05]  245.36,44.07 90 bottom
TP39  [PAD.03X.05]  239.78,43.81 90 bottom
TP40  [PAD.03X.05]  252.48,43.31 90 bottom
TP41  [PAD.03X.05]  255.02,43.31 90 bottom
TP42  [PAD.03X.05]  257.56,43.31 180 bottom
TP43  [PAD.03X.05]  211.71,55.24 180 bottom
TP44  [PAD.03X.05]  243.08,8.13 90 bottom
TP45  [PAD.03X.05]  215.14,14.48 0 bottom
TP46  [PAD.03X.05]  243.08,10.03 0 bottom
TP47  [PAD.03X.05]  220.22,8.13 0 bottom
TP48  [PAD.03X.05]  217.55,8.13 0 bottom
TP49  [PAD.03X.05]  67.56,97.16 90 bottom
TP50  [PAD.03X.05]  52.58,97.92 90 bottom
TP51  [PAD.03X.05]  46.99,97.66 90 bottom
TP52  [PAD.03X.05]  59.69,97.16 90 bottom
TP53  [PAD.03X.05]  62.23,97.16 90 bottom
TP54  [PAD.03X.05]  64.77,97.16 180 bottom
TP55  [PAD.03X.05]  18.92,109.09 180 bottom
TP56  [PAD.03X.05]  50.29,61.98 90 bottom
TP57  [PAD.03X.05]  22.35,68.33 0 bottom
TP58  [PAD.03X.05]  50.29,63.88 0 bottom
TP59  [PAD.03X.05]  27.43,61.98 0 bottom
TP60  [PAD.03X.05]  24.77,61.98 0 bottom
TP61  [PAD.03X.05]  131.83,97.16 90 bottom
TP62  [PAD.03X.05]  116.84,97.92 90 bottom
TP63  [PAD.03X.05]  111.25,97.66 90 bottom
TP64  [PAD.03X.05]  123.95,97.16 90 bottom
TP65  [PAD.03X.05]  126.49,97.16 90 bottom
TP66  [PAD.03X.05]  129.03,97.16 180 bottom
TP67  [PAD.03X.05]  83.19,109.09 180 bottom
TP68  [PAD.03X.05]  114.55,61.98 90 bottom
TP69  [PAD.03X.05]  86.61,68.33 0 bottom
TP70  [PAD.03X.05]  114.55,63.88 0 bottom
TP71  [PAD.03X.05]  91.69,61.98 0 bottom
TP72  [PAD.03X.05]  89.03,61.98 0 bottom
TP73  [PAD.03X.05]  196.09,97.16 90 bottom
TP74  [PAD.03X.05]  181.1,97.92 90 bottom
TP75  [PAD.03X.05]  175.51,97.66 90 bottom
TP76  [PAD.03X.05]  188.21,97.16 90 bottom
TP77  [PAD.03X.05]  190.75,97.16 90 bottom
TP78  [PAD.03X.05]  193.29,97.16 180 bottom
TP79  [PAD.03X.05]  147.45,109.09 180 bottom
TP80  [PAD.03X.05]  178.82,61.98 90 bottom
TP81  [PAD.03X.05]  150.88,68.33 0 bottom
TP82  [PAD.03X.05]  178.82,63.88 0 bottom
TP83  [PAD.03X.05]  155.96,61.98 0 bottom
TP84  [PAD.03X.05]  153.29,61.98 0 bottom
TP85  [PAD.03X.05]  260.35,97.16 90 bottom
TP86  [PAD.03X.05]  245.36,97.92 90 bottom
TP87  [PAD.03X.05]  239.78,97.66 90 bottom
TP88  [PAD.03X.05]  252.48,97.16 90 bottom
TP89  [PAD.03X.05]  255.02,97.16 90 bottom
TP90  [PAD.03X.05]  257.56,97.16 180 bottom
TP91  [PAD.03X.05]  211.71,109.09 180 bottom
TP92  [PAD.03X.05]  243.08,61.98 90 bottom
TP93  [PAD.03X.05]  215.14,68.33 0 bottom
TP94  [PAD.03X.05]  243.08,63.88 0 bottom
TP95  [PAD.03X.05]  220.22,61.98 0 bottom
TP96  [PAD.03X.05]  217.55,61.98 0 bottom
U1  XBEE-1XBEE-1_LOCK  [XBEE-1_LOCK]  38.86,29.72 90 top
U2  ARDUINO  [UNO_R3_SHIELD_NOLABELS_LOCK]  10.92,60.2 270 top
U3  TB6612FNG  [SSOP24]  54.1,33.53 0 top
U4  ARDUINO  [UNO_R3_SHIELD_NOLABELS_LOCK]  75.18,60.2 270 top
U5  TB6612FNG  [SSOP24]  118.36,33.53 0 top
U6  XBEE-1XBEE-1_LOCK  [XBEE-1_LOCK]  103.12,29.72 90 top
U7  ARDUINO  [UNO_R3_SHIELD_NOLABELS_LOCK]  139.45,60.2 270 top
U8  TB6612FNG  [SSOP24]  182.63,33.53 0 top
U9  XBEE-1XBEE-1_LOCK  [XBEE-1_LOCK]  167.39,29.72 90 top
U10  ARDUINO  [UNO_R3_SHIELD_NOLABELS_LOCK]  203.71,60.2 270 top
U11  TB6612FNG  [SSOP24]  246.89,33.53 0 top
U12  XBEE-1XBEE-1_LOCK  [XBEE-1_LOCK]  231.65,29.72 90 top
U13  ARDUINO  [UNO_R3_SHIELD_NOLABELS_LOCK]  10.92,114.05 270 top
U14  TB6612FNG  [SSOP24]  54.1,87.38 0 top
U15  XBEE-1XBEE-1_LOCK  [XBEE-1_LOCK]  38.86,83.57 90 top
U16  ARDUINO  [UNO_R3_SHIELD_NOLABELS_LOCK]  75.18,114.05 270 top
U17  TB6612FNG  [SSOP24]  118.36,87.38 0 top
U18  XBEE-1XBEE-1_LOCK  [XBEE-1_LOCK]  103.12,83.57 90 top
U19  ARDUINO  [UNO_R3_SHIELD_NOLABELS_LOCK]  139.45,114.05 270 top
U20  TB6612FNG  [SSOP24]  182.63,87.38 0 top
U21  XBEE-1XBEE-1_LOCK  [XBEE-1_LOCK]  167.39,83.57 90 top
U22  ARDUINO  [UNO_R3_SHIELD_NOLABELS_LOCK]  203.71,114.05 270 top
U23  TB6612FNG  [SSOP24]  246.89,87.38 0 top
U24  XBEE-1XBEE-1_LOCK  [XBEE-1_LOCK]  231.65,83.57 90 top

## Library data of the parts
C1 C2 C5 C6 C9 C10 C13 C14 C17 C18 C21 C22 C25 C26 C29 C30 = SparkFun-Capacitors; PROD_ID: CAP-08604
C3 C4 C7 C8 C11 C12 C15 C16 C19 C20 C23 C24 C27 C28 C31 C32 = SparkFun-Capacitors; PROD_ID: CAP-09824
D1 D5 D7 D11 D12 D18 D21 D22 D28 D31 D32 D38 D41 D42 D48 D51 D52 D58 D61 D62 D68 D71 D72 D78 = SparkFun-LED; PROD_ID: DIO-09003
D2 D8 D15 D16 D25 D26 D35 D36 D45 D46 D55 D56 D65 D66 D75 D76 = SparkFun-LED; PROD_ID: DIO-00821
D3 D17 D27 D37 D47 D57 D67 D77 = SparkFun-LED; PROD_ID: DIO-00819
D4 D6 D13 D14 D23 D24 D33 D34 D43 D44 D53 D54 D63 D64 D73 D74 = SparkFun-LED; PROD_ID: DIO-08575
D9 D10 D19 D20 D29 D30 D39 D40 D49 D50 D59 D60 D69 D70 D79 D80 = SparkFun-DiscreteSemi; PROD_ID: DIO-09886
E$1 SJ1-SJ8 = SparkFun-Retired
E$5 E$6 FID1-FID32 LOGO1-LOGO32 = SparkFun-Aesthetics
F1-F24 = SparkFun-PowerIC; PROD_ID: RES-11150
J1 J4 J7 J10 J13 J16 J19 J22 = SparkFun-Connectors; PROD_ID: CONN-08106; SF_ID: PRT-12748
J2 J5 J8 J11 J14 J17 J20 J23 = SparkFun-Connectors; PROD_ID: CONN-12382
J3 J6 J9 J12 J15 J18 J21 J24 JP0 JP1-JP19 JP23-JP44 JP46 JP47 JP49-JP68 JP70 JP71 JP73-JP92 JP94 JP95 JP97-JP116 JP118 JP119 JP121-JP140 JP142 JP143 JP145-JP164 JP166 JP167 JP169-JP188 JP190 JP191 = SparkFun-Connectors
JP20-JP22 JP45 JP48 JP69 JP72 JP93 JP96 JP117 JP120 JP141 JP144 JP165 JP168 JP189 = SparkFun-Connectors; PROD_ID: CONN-09696
Q1 Q2 Q7 Q8 Q13 Q14 Q19 Q20 Q25 Q26 Q31 Q32 Q37 Q38 Q43 Q44 = SparkFun-DiscreteSemi; PROD_ID: TRANS-00830
Q3 Q9 Q15 Q21 Q27 Q33 Q39 Q45 = SparkFun-DiscreteSemi; PROD_ID: TRANS-08049
Q4-Q6 Q10-Q12 Q16-Q18 Q22-Q24 Q28-Q30 Q34-Q36 Q40-Q42 Q46-Q48 = SparkFun-DiscreteSemi; PROD_ID: TRANS-11308
R1-R4 R6-R14 R19-R22 R24-R32 R37-R40 R42-R50 R55-R58 R60-R68 R73-R76 R78-R86 R91-R94 R96-R104 R109-R112 R114-R122 R127-R130 R132-R140 = SparkFun-Resistors; PROD_ID: RES-07856
R5 R23 R41 R59 R77 R95 R113 R131 = SparkFun-Resistors; PROD_ID: RES-00818
R15-R18 R33-R36 R51-R54 R69-R72 R87-R90 R105-R108 R123-R126 R141-R144 = SparkFun-Resistors; PROD_ID: RES-00824
S1-S3 S6-S8 S10-S12 S14-S16 S18-S20 S22-S24 S26-S28 S30-S32 = SparkFun-Electromechanical; PROD_ID: SWCH-08179
S4 S5 S9 S13 S17 S21 S25 S29 = SparkFun-Electromechanical; PROD_ID: SWCH-08247
TP1-TP96 = SparkFun-Passives
U1 U6 U9 U12 U15 U18 U21 U24 = SparkFun-RF
U2 U4 U7 U10 U13 U16 U19 U22 = SparkFun-Boards
U3 U5 U8 U11 U14 U17 U20 U23 = SparkFun-PowerIC; PROD_ID: IC-09363